# EAGLE board SparkoStat (EAGLE 7.2.0)
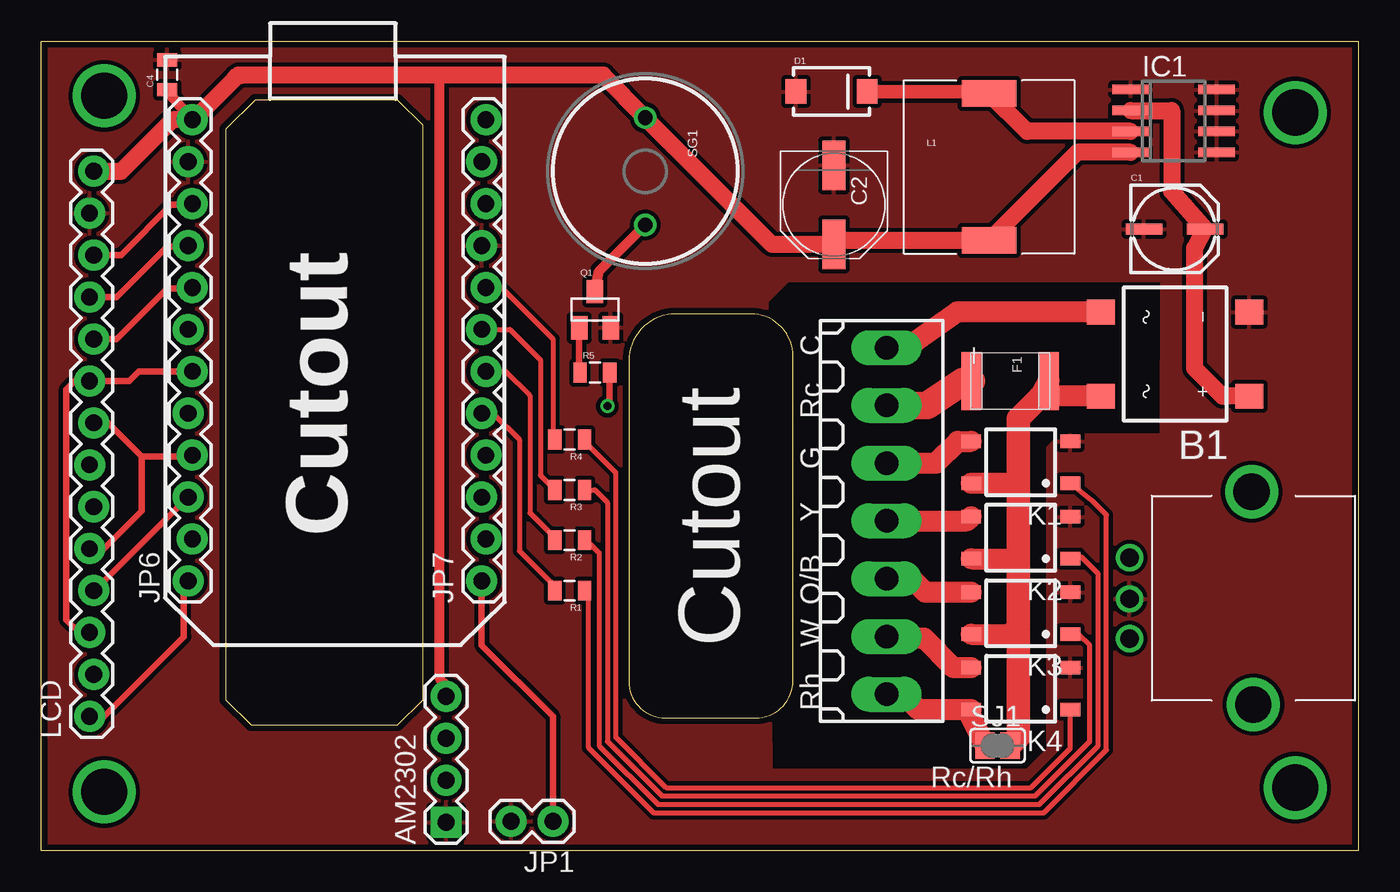
[diagram p0: board, top side]
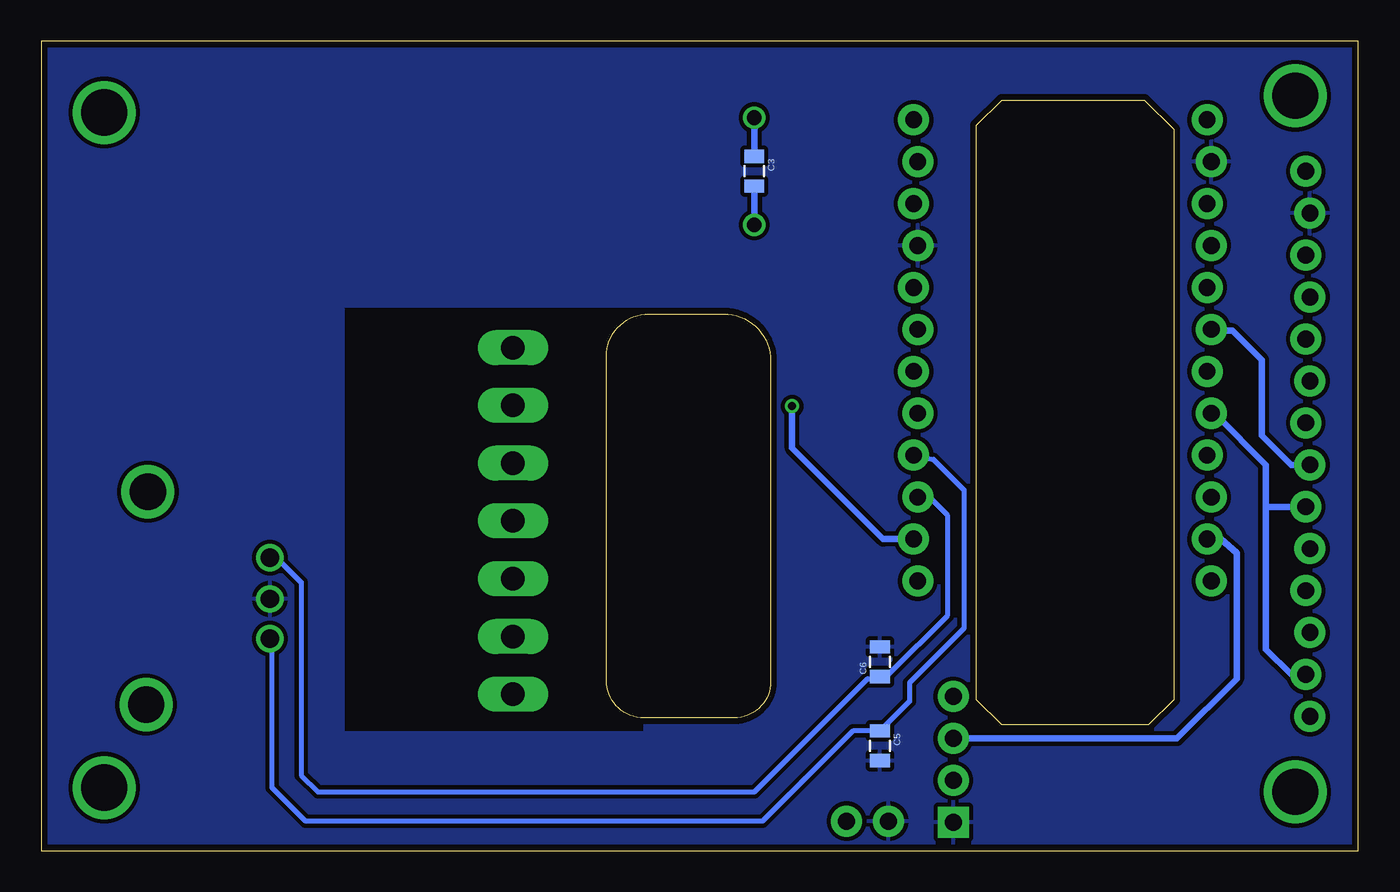
[diagram p1: board, bottom side, seen from below]

Size 79.76 x 49.02 mm. Coordinates in mm from the lower left corner, seen from the top.
Outline: 79.76,0 0,0 0,49.02 79.76,49.02 79.76,0
Outline: 45.53,10.3 45.53,29.93 arc90 42.95,32.51 38.44,32.51 arc90 35.58,29.65 35.58,10.24 arc90 37.78,8.04 43.27,8.04 arc90 45.53,10.3
Outline: 11.18,43.69 11.18,9.14 12.7,7.62 21.59,7.62 23.11,9.14 23.11,43.94 21.59,45.47 12.95,45.47 11.18,43.69
Copper layers (1*16): Top 0.0356mm / dielectric 1.5011mm / Bottom 0.0356mm
Design rules "LaenPCBOrder": minimum track width 6mil, minimum drill 13mil, track to track 6mil, track to pad 6mil, pad to pad 6mil, via to via 6mil, smd to smd 6mil, copper to edge 15mil, drill to drill 6mil, minimum pad ring 7mil, minimum via ring 7mil, stop-mask expansion 4mil, vias tented up to drill 0mil, thermal gap 10mil

## Footprints (pad centres in the part's own frame; a part is rotated, then mirrored left to right if it is on the bottom)
180-7 = drill 1.422 long: 1 -10.5,0; 2 -7,0; 3 -3.5,0; 4 0,0; 5 3.5,0; 6 7,0; 7 10.5,0
1X04 = drill 1.016 pad 1.88 square: 1 0,0 | drill 1.016 pad 1.88: 2 2.54,0; 3 5.08,0; 4 7.62,0
DFS = smd 1.5 x 1.7: + -2.55,-4.5; - 2.55,-4.5; AC1 -2.55,4.5; AC2 2.55,4.5
PANASONIC_C = smd 2.2 x 0.65: + 1.9,-0.2; - -1.8,-0.2
PANASONIC_D = smd 3 x 1.4: + 2.4,0; - -2.4,0
0805 = smd 0.8 x 1.2: 1 -0.9,0; 2 0.9,0
SMA-DIODE = smd 1.27 x 1.47: A -2.15,0; C 2.15,0
ROTORY_ENC = drill 1.1: A -7.5,2.5; B -7.5,-2.4; C -7.5,0 | drill 2.2: P$1 -0.1,6.5; P$2 0,-6.4
L4,8 = smd 3.5 x 1.2: P$1 0,-2.35; P$2 0,2.35
SO-08 = smd 0.6 x 2.2: 1 -1.905,-2.6; 2 -0.635,-2.6; 3 0.635,-2.6; 4 1.905,-2.6; 5 1.905,2.6; 6 0.635,2.6; 7 -0.635,2.6; 8 -1.905,2.6
1X02 = drill 1.016 pad 1.88: 1 0,0; 2 2.54,0
1X12_LOCK = drill 1.016 pad 1.88: 1 0,0.127; 2 2.54,-0.127; 3 5.08,0.127; 4 7.62,-0.127; 5 10.16,0.127; 6 12.7,-0.127; 7 15.24,0.127; 8 17.78,-0.127; 9 20.32,0.127; 10 22.86,-0.127; 11 25.4,0.127; 12 27.94,-0.127
SOP04 = smd 0.8 x 1.2: 1 -1.27,-3; 2 1.27,-3; 3 1.27,3; 4 -1.27,3
DR1030 = smd 3.3 x 1.6: 1 0,4.45; 2 0,-4.45
1X14_LOCK = drill 1.016 pad 1.88: 1 0,0.127; 2 2.54,-0.127; 3 5.08,0.127; 4 7.62,-0.127; 5 10.16,0.127; 6 12.7,-0.127; 7 15.24,0.127; 8 17.78,-0.127; 9 20.32,0.127; 10 22.86,-0.127; 11 25.4,0.127; 12 27.94,-0.127; 13 30.48,0.127; 14 33.02,-0.127
SOT23 = smd 1 x 1.4: 1 -0.95,-1.1; 2 0.95,-1.1; 3 0,1.1
BUZZER-12MM-NS = drill 0.9: + 3.25,0; - -3.25,0
SJ = smd 1.168 x 1.6: 1 -0.762,0; 2 0.762,0

## Placement (x,y rotation side)
_  [180-7]  51.19,19.97 270 top
AM2302  AM2302  [1X04]  24.52,1.72 90 top
B1  DF206S-G  [DFS]  68.67,30.07 90 top
C1  UWD1V150MCL1  [PANASONIC_C]  68.58,37.85 0 top
C2  UCL1A221MCL1GS  [PANASONIC_D]  48.01,39.12 270 top
C3  0.1uF  [0805]  36.58,41.15 270 bottom
C4  0.1uF  [0805]  7.62,46.99 90 top
C5  0.01uF  [0805]  28.96,6.35 270 bottom
C6  0.01uF  [0805]  28.96,11.43 90 bottom
D1  B260A-13-F  [SMA-DIODE]  47.87,45.98 0 top
ENC  ROTARY_ENCODER  [ROTORY_ENC]  73.41,15.24 0 top
F1  1.5  [L4,8]  58.67,28.45 270 top
IC1  MIC4680-5.0YM  [SO-08]  68.58,44.2 270 top
JP1  [1X02]  30.99,1.78 180 top
JP6  [1X12_LOCK]  9.02,16.33 90 top
JP7  [1X12_LOCK]  26.8,16.33 90 top
K1  AQY282EHA  [SOP04]  59.32,23.52 90 top
K2  AQY282EHA  [SOP04]  59.32,18.95 90 top
K3  AQY282EHA  [SOP04]  59.32,14.38 90 top
K4  AQY282EHA  [SOP04]  59.32,9.81 90 top
L1  68uH  [DR1030]  57.4,41.4 0 top
LCD  2.4TouchLCD  [1X14_LOCK]  3.05,8.13 90 top
Q1  NPN  [SOT23]  33.53,32.77 0 top
R1  470  [0805]  32,15.75 180 top
R2  470  [0805]  32,18.8 180 top
R3  470  [0805]  32,21.84 180 top
R4  470  [0805]  32,24.89 180 top
R5  200  [0805]  33.53,28.96 0 top
SG1  BUZZER  [BUZZER-12MM-NS]  36.58,41.15 270 top
SJ1  [SJ]  57.91,6.35 0 top

## Library data of the parts
_ = con-weidmueller-sl35; OC_FARNELL: unknown; OC_NEWARK: unknown
AM2302 JP1 JP6 JP7 LCD = SparkFun-Connectors
B1 = rectifier
C1-C6 = SparkFun-Capacitors
D1 Q1 = SparkFun-DiscreteSemi
ENC = CuriousTech
F1 = Capacitor-Wima-SMD1812-100v
IC1 = v-reg
K1-K4 = relay; OC_FARNELL: unknown; OC_NEWARK: unknown
L1 R1-R5 = SparkFun-Passives
SG1 = SparkFun-Electromechanical
SJ1 = jumper

## Nets
+3V3: JP7.12
+5V: AM2302.4 C2.+ C3.1 C4.1 IC1.4 JP6.12 L1.2 LCD.14 SG1.-
COOL: JP7.6 R2.2
DHT: AM2302.3 JP6.2
ENC_A: C6.1 ENC.A JP7.3
ENC_B: C5.1 ENC.B JP7.4
FAN: JP7.5 R1.2
GND: AM2302.1 B1.- C1.- C2.- C4.2 C5.2 C6.2 D1.A ENC.C IC1.1 IC1.5 IC1.6 IC1.7 IC1.8 JP1.2 JP6.11 JP7.9 K1.2 K2.2 K3.2 K4.2 LCD.13 Q1.2
HEAT: JP7.8 R4.2
N$1: JP6.1 LCD.1
N$2: D1.C IC1.3 L1.1
N$3: _.6 K4.3
N$4: K1.1 R1.1
N$7: K2.1 R2.1
N$9: B1.AC1 F1.P$2 K1.4 K2.4 K3.4 SJ1.2
N$10: K3.1 R3.1
N$11: K4.1 R4.1
N$13: _.4 K2.3
N$15: _.3 K1.3
N$20: _.1 B1.AC2
N$22: JP6.6 LCD.3 LCD.9
N$23: JP6.5 LCD.2 LCD.6
N$24: B1.+ C1.+ IC1.2
N$25: JP6.9 LCD.11
N$26: JP6.10 LCD.12
N$27: JP6.8 LCD.10
N$28: JP6.4 LCD.5 LCD.8
N$29: _.5 K3.3
N$30: JP6.7 LCD.7
N$32: _.2 F1.P$1
N$34: C3.2 Q1.3 SG1.+
N$35: JP6.3 LCD.4
N$36: _.7 K4.4 SJ1.1
N$39: Q1.1 R5.1
OPT: JP1.1 JP7.1
REV: JP7.7 R3.2
TONE: JP7.2 R5.2

## Tracks (layer width: path | path; a pad name or v marks a point on that pad's centre or on a via)
+5V
  Top 0.305: 7.81,45.79 C4.1
  Top 0.61: JP6.12 9.22,44.27 | 11.68,46.74 16.26,46.99 | JP6.12 8.89,44.27 | JP6.12 7.81,45.79 | AM2302.4 24.52,10.02 24.13,10.41 24.13,46.99
  Top 1.016: LCD.14 4.83,41.15 7.95,44.27 8.89,44.27 | 9.22,44.27 11.68,46.74 11.94,46.99 16.26,46.99 24.13,46.99 34.04,46.99 34.04,46.94 SG1.- 44.26,36.72 C2.+ 48.24,36.95 L1.2 | 58.17,37.21 L1.2 | IC1.4 62.74,42.29 L1.2
  Bottom 0.406: C3.1 SG1.-
COOL
  Top 0.305: JP7.6 28.12,29.03 29.59,27.56 29.59,20.44 31.1,18.92 R2.2
DHT
  Bottom 0.406: AM2302.3 10.98,6.8 7.37,10.41 7.37,18.03 8.31,18.87 JP6.2
ENC_A
  Bottom 0.305: JP7.3 25.98,21.41 24.89,20.32 24.89,14.22 28.45,10.67 28.82,10.67 C6.1 29.07,10.41 29.72,10.41 36.58,3.56 62.99,3.56 64.01,4.57 64.01,16.26 65.49,17.74 ENC.A
ENC_B
  Bottom 0.305: JP7.4 25.73,23.69 23.88,21.84 23.88,13.46 27.18,10.16 27.18,9.03 C5.1 30.6,7.25 36.07,1.78 63.75,1.78 65.79,3.81 65.79,12.72 ENC.B
FAN
  Top 0.305: R1.2 31.1,16 28.96,18.15 28.96,24.89 27.36,26.49 JP7.5
GND
  pour Top (isolate 0.254): 0,0 79.96,-0.25 79.71,34.34 67.87,34.34 67.82,25.15 61.72,25.15 60.96,24.38 60.96,6.1 59.69,4.83 44.2,4.83 43.94,33.27 45.21,34.54 79.76,34.54 79.96,49.02 0,49.28
  pour Bottom (isolate 0.254): 0,-0.25 0,49.28 79.76,49.28 79.76,33.02 43.18,33.02 43.18,7.11 61.47,7.11 61.47,32.77 79.76,32.77 79.76,0 0.25,0
HEAT
  Top 0.305: JP7.8 27.87,34.11 30.99,30.99 30.99,25.01 R4.2
N$1
  Top 0.406: LCD.1 3.81,8.13 8.64,12.95 8.64,16.07 JP6.1
N$2
  Top 0.813: D1.C 57.4,45.98 L1.1
  Top 1.016: IC1.3 59.7,43.56 L1.1
N$3
  Top 1.27: K4.3 55.25,11.08 53.48,12.85 51.3,12.85 _.6
N$4
  Top 0.305: K1.1 63.6,21.24 64.52,20.32 64.52,6.1 60.71,2.29 37.08,2.29 33.16,6.21 33.16,15.24 R1.1
N$5  (via drill 2.8)
  other vias: 3.81,3.56
N$6  (via drill 2.8)
  other vias: 75.95,44.7
N$7
  Top 0.305: K2.1 62.47,17.78 62.99,17.78 64.01,16.76 64.01,6.35 60.45,2.79 37.34,2.79 33.78,6.35 33.78,18.03 33.02,18.8 R2.1
N$8  (via drill 2.8)
  other vias: 3.81,45.72
N$9
  Top 1.27: K3.4 58.57,13.11 | 58.57,13.11 59.18,13.21 59.18,13.52 58.57,13.11 | K1.4 58.57,22.25 59.18,22.35 | K2.4 59.08,17.68 59.18,17.78 | F1.P$2 60.96,28.38 60.45,27.43 61.12,27.52 B1.AC1
  Top 1.422: 59.18,13.52 59.18,17.78 59.18,22.35 59.18,26.16 60.45,27.43 | SJ1.2 59.18,6.86 59.18,13.21
N$10
  Top 0.305: R3.1 33.53,21.84 34.29,21.08 34.29,6.6 37.59,3.3 60.2,3.3 63.5,6.6 63.5,12.45 62.84,13.11 K3.1
N$11
  Top 0.305: K4.1 62.32,6.18 59.94,3.81 37.85,3.81 34.8,6.86 34.8,22.86 32.77,24.89 R4.1
N$13
  Top 1.27: 56.02,19.97 K2.3 56.06,19.97 _.4
N$15
  Top 1.27: K1.3 55.51,24.79 54.18,23.47 _.3
N$20
  Top 1.27: B1.AC2 55.48,32.62 52.83,30.73 51.46,30.73 _.1
N$22
  Top 0.406: LCD.3 2.29,13.21 1.52,13.97 1.52,27.94 2.03,28.45 LCD.9 5.33,28.45 5.91,29.03 JP6.6
N$23
  Bottom 0.406: LCD.6 5.59,20.83 | 5.59,20.83 5.59,23.37 8.64,26.42 8.82,26.42 | LCD.2 4.06,10.67 5.59,12.19 5.59,20.83
  Bottom 0.61: 8.82,26.42 JP6.5
N$24
  Top 1.016: B1.+ 71.54,27.52 69.85,29.21 69.85,36.51 C1.+ 68.45,39.93 68.45,44.83 IC1.2
N$25
  Top 0.406: LCD.11 4.57,33.53 7.62,36.58 8.82,36.58 JP6.9
N$26
  Top 0.406: LCD.12 4.83,36.07 7.87,39.12 9.08,39.12 JP6.10
N$27
  Top 0.406: LCD.10 4.57,30.99 7.62,34.04 9.08,34.04 JP6.8
N$28
  Top 0.406: LCD.8 4.06,25.91 6.1,23.88 | 6.1,23.88 9.08,23.88 JP6.4 | LCD.5 3.81,18.29 6.1,20.57 6.1,23.88
N$29
  Top 1.27: K3.3 53.53,15.65 52.71,16.47 _.5
N$30
  Bottom 0.406: LCD.7 4.06,23.37 5.84,25.15 5.84,29.72 7.62,31.5 8.82,31.5 JP6.7
N$32
  Top 1.676: _.2 53.64,26.97 55.88,28.45 F1.P$1
N$34
  Top 0.61: Q1.3 33.78,35.1 SG1.+
  Bottom 0.406: C3.2 SG1.+
N$35
  Top 0.305: LCD.4 3.23,15.75
  Top 0.406: 3.23,15.75 JP6.3
N$36
  Top 1.27: SJ1.1 56.13,8.38 56.23,8.28 K4.4 53.14,8.54 52.21,9.47 _.7
N$38  (via drill 2.8)
  other vias: 75.95,3.81
N$39
  Top 0.406: Q1.1 32.58,29.01 R5.1
OPT
  Top 0.406: JP1.1 30.99,8.13 26.68,12.44 JP7.1
REV
  Top 0.305: JP7.7 28.38,31.57 30.23,29.72 30.23,22.72 R3.2
TONE  (via drill 0.5)
  Top 0.406: R5.2 34.43,27.06 v34.29,26.92
  Bottom 0.406: JP7.2 28.77,18.87 34.29,24.38 v34.29,26.92

## Text on the board
tPlace: Cutout | Cutout | Rc/Rh
bStop: CuriousTech.net | Spark-O-Stat
_tsilk: C | Rc | G | Y | O/B | W | Rh